# Altium PCB 新苗.PcbDoc
Units mil, origin at the board's own origin, x right, y up, seen from the top; angles counter-clockwise.
Board outline 4469.79 x 3510.17 mil, 2 copper layers (Top Layer, Bottom Layer); 35 components, 129 nets, 275 pads, 129 vias.
Unrouted connection lines stored in the file: 2.
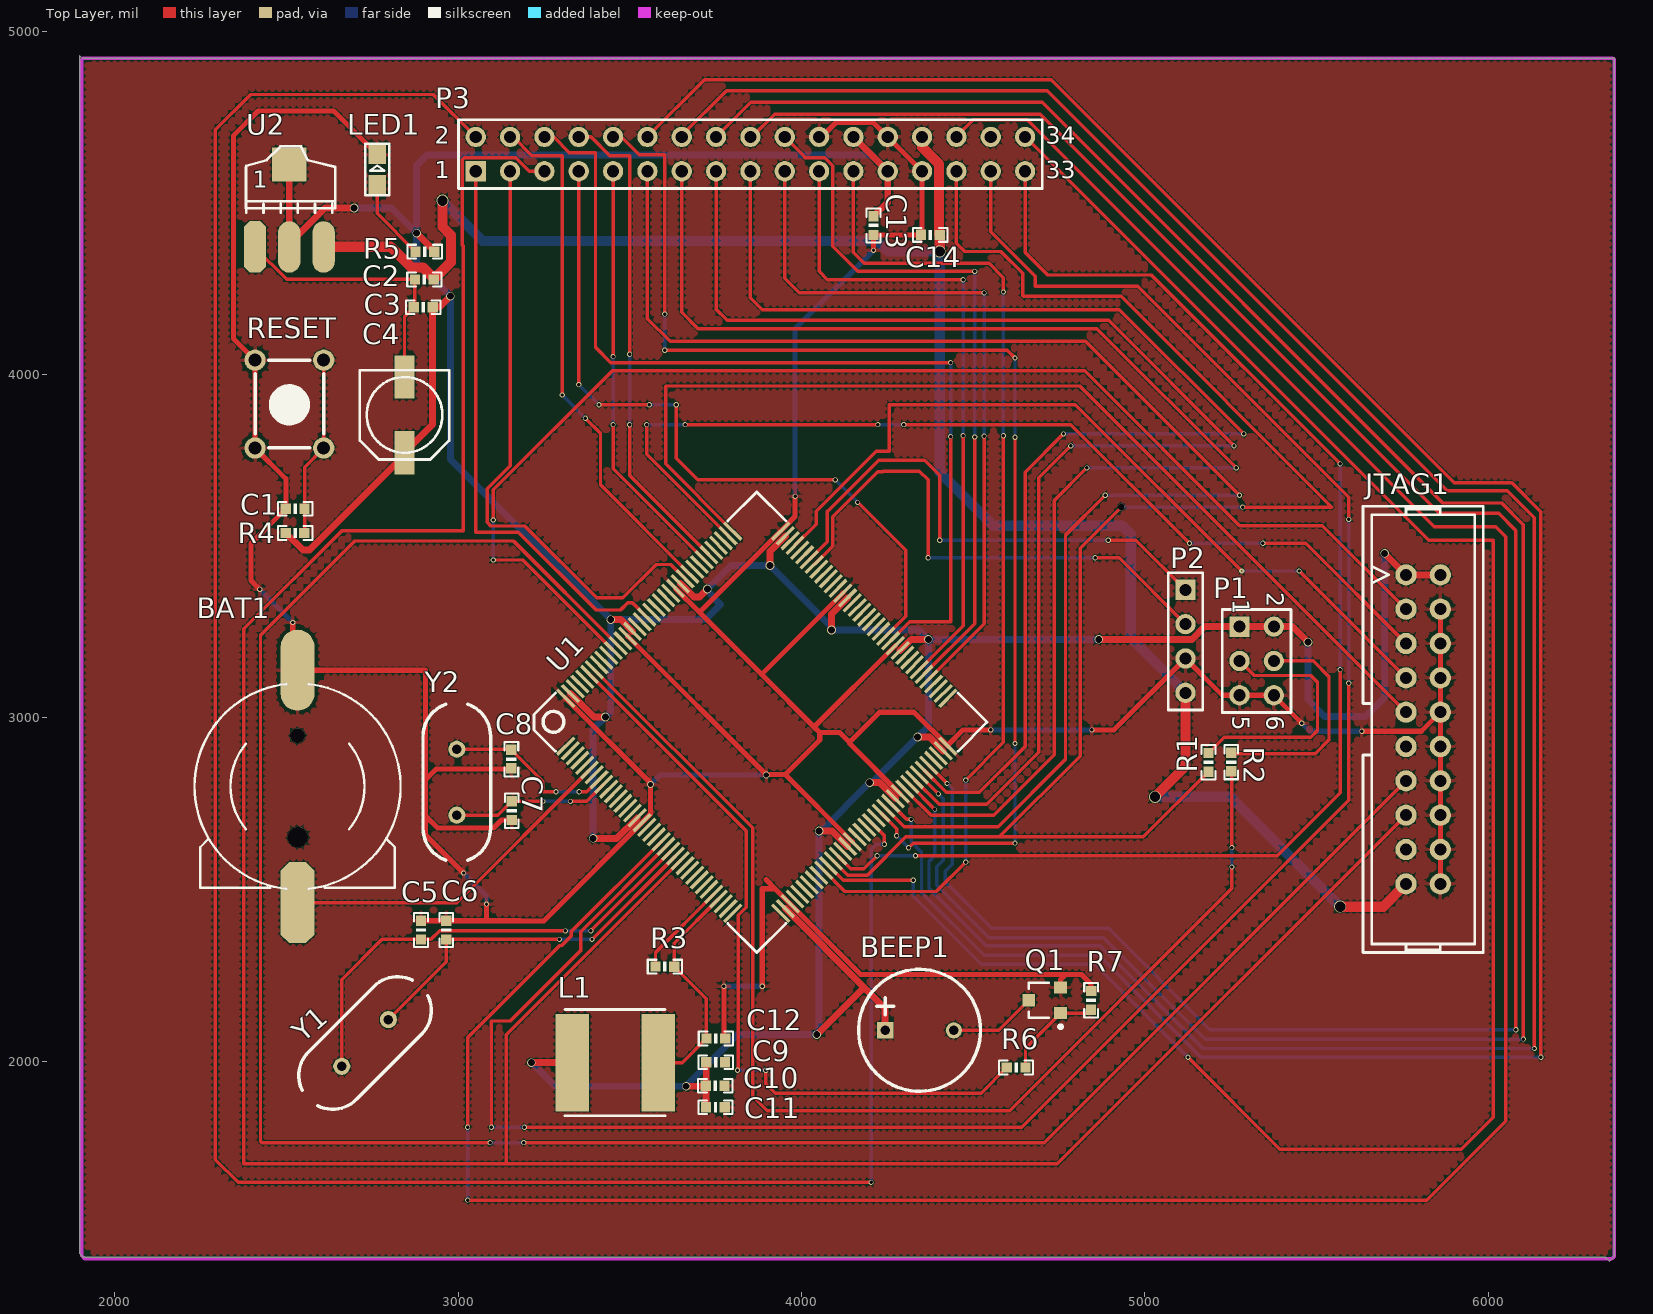
[diagram p0: Top Layer view]
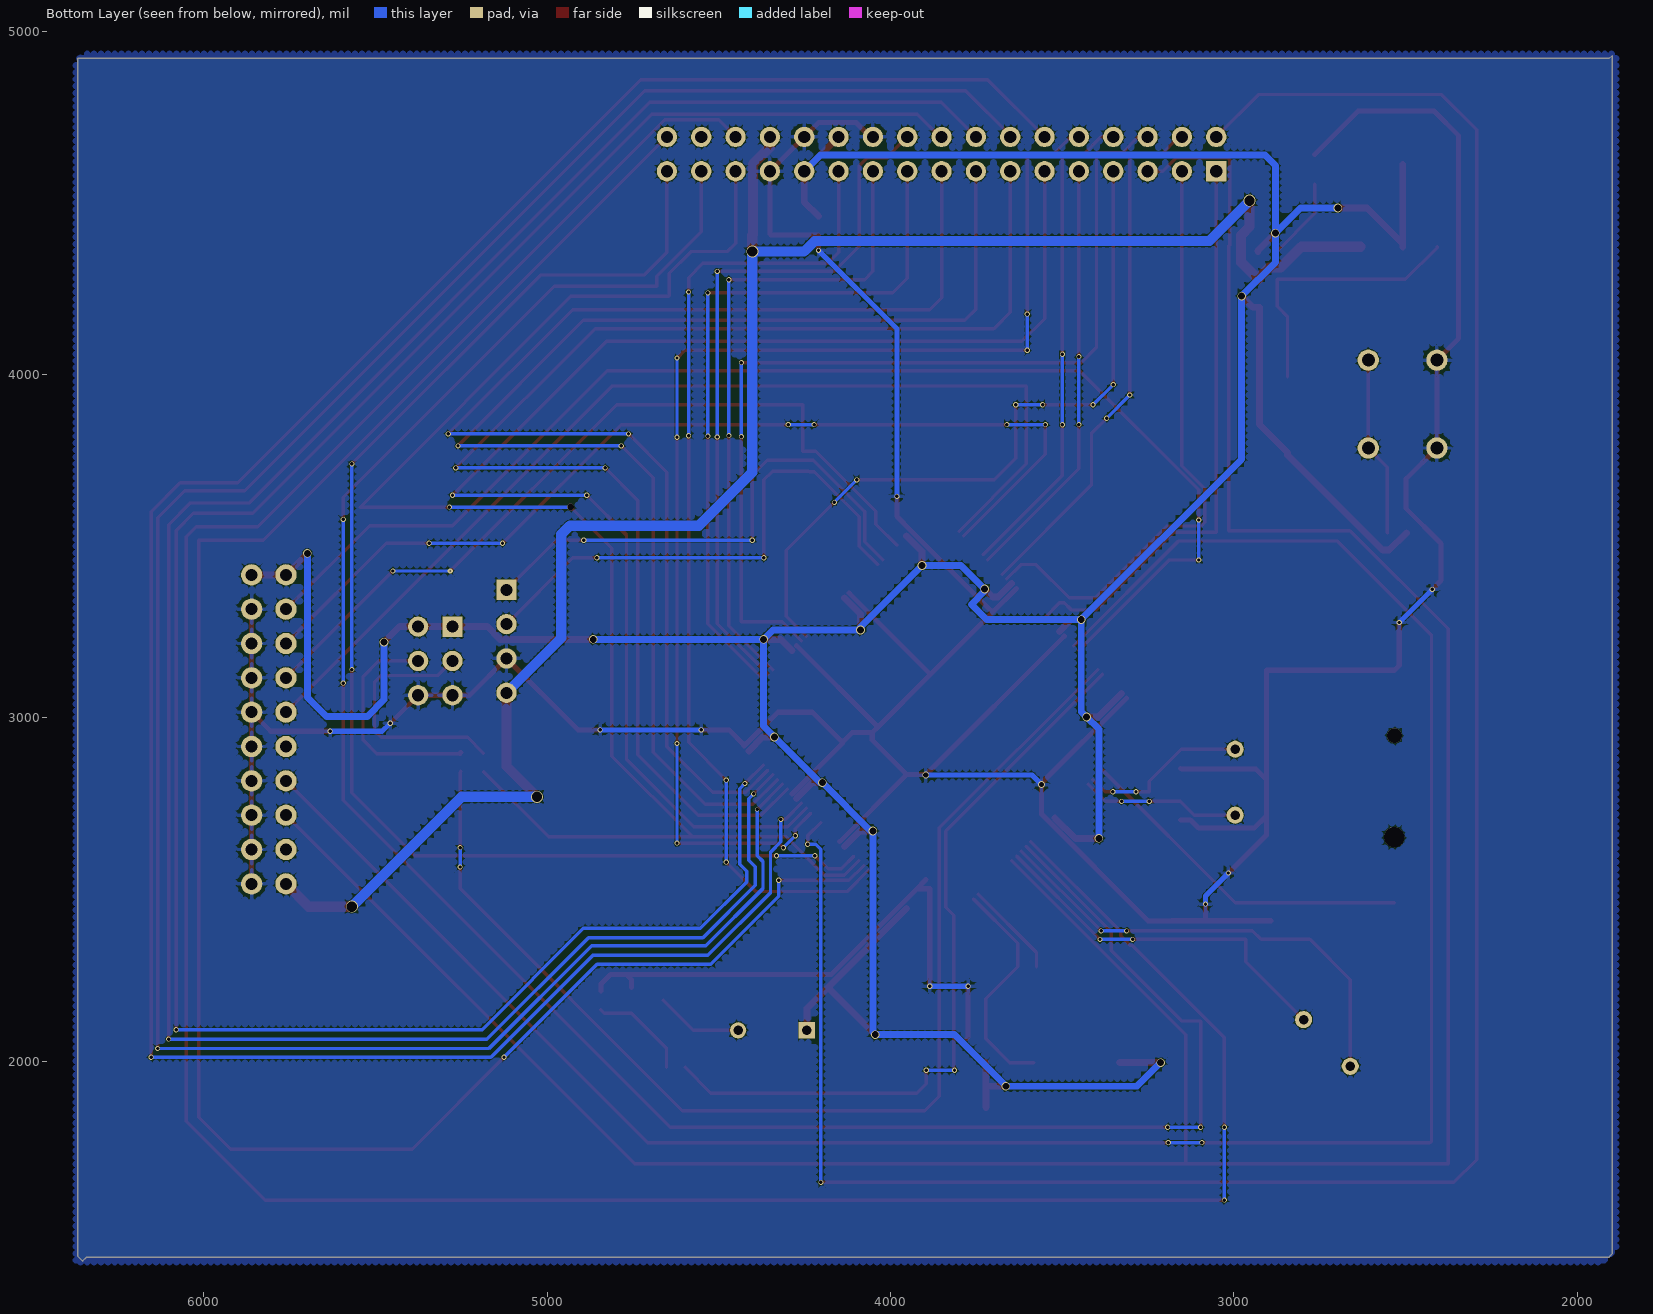
[diagram p1: Bottom Layer view, seen from below]

## Layer stack, top to bottom
Top Layer: signal copper 1.4
Dielectric: dielectric 12.6, FR-4, Dk 4.8
Bottom Layer: signal copper 1.4

## Board outline
1906.64,4921.54 6368.2,4921.54 6368.2,1432.12 6353.66,1417.58 6342.51,1428.73 1908.03,1428.73 1904.14,1432.62 1898.41,1438.36 1898.41,4927.75

## Design rules (kind name [scope] priority, off if disabled: settings)
Clearance [All] p1: gap=2
HoleToHoleClearance [All] p1: gap=1 allowstackedmicrovias=TRUE
MinimumSolderMaskSliver [All] p1: minsoldermaskwidth=1
PolygonConnect [All] p1: connectstyle=Relief reliefconductorwidth=10 reliefentries=4 polygonreliefangle="90 Angle" airgapwidth=10
RoutingVias [All] p1: holewidth=10 width=15 viastyle="Through Hole" minholewidth=10 minwidth=12 maxholewidth=40 maxwidth=30
SilkToSilkClearance [All] p1: silktosilkclearance=1
SilkToSolderMaskClearance [IsPad] p1: minsilkscreentomaskgap=0 clearancetoexposedcopper=TRUE
SolderMaskExpansion [All] p1: expansion=2
Width GND [InNet('GND')] p1: maxlimit=50 minlimit=5 preferedwidth=15
Width 3V3 [InNet('3V3')] p2: maxlimit=20 minlimit=20 preferedwidth=20
Width +5 [InNet('+5')] p3: maxlimit=30 minlimit=30 preferedwidth=30
Width [All] p4: maxlimit=30 minlimit=10 preferedwidth=10
24 further rules are at their usual default settings.

## Components (designator, comment, footprint, x,y, rotation, side; value= is the part's Value field where it differs from the comment)
BAT1 "BATT" BATM 2532.32,2800.09 r0 top
BEEP1 "BEEP" BELL-5 4244.01,2089.71 r0 top
C1 "0.1uF" 0603P 2525.37,3609.15 r0 top
C2 "0.1uF" 0603P 2901.91,4276.74 r180 top
C3 "0.1uF" 0603P 2898.32,4195.9 r0 top
C4 "47uF" CC6.56.5 2844.02,3882.31 r90 top
C5 "22pF" 0603P 2891.99,2381.84 r270 top
C6 "22pF" 0603P 2965.42,2381.84 r270 top
C7 "22pF" 0603P 3156.12,2729.09 r90 top
C8 "22pF" 0603P 3155.16,2879.59 r90 top
C9 "0.1uF" 0603P 3750.4,1996.82 r180 top
C10 "0.1uF" 0603P 3749.3,1928.37 r180 top
C11 "0.1uF" 0603P 3749.78,1865.28 r180 top
C12 "1uF" 0603P 3750.95,2065.81 r180 top
C13 "104" 0603P 4210.05,4434 r270 top
C14 "104" 0603P 4375.32,4406.53 r0 top
JTAG1 "JTAG" JTAG_20 5811.05,2966.3 r270 top
L1 "4.7uH" L_SOP74 3582.83,1995.69 r180 top
LED1 "RED" SMDLED 2764.43,4553.5 r90 top
P1 "Header 3X2" HDR2X3 5276.1,3265.54 r270 top
P2 "Header 4" HDR1X4 5118.78,3372.8 r270 top
P3 "Header 17X2" HDR2X17 3051.53,4591.81 r0 top
Q1 "S8050" SOT-23R 4713.52,2177.1 r90 top
R1 "100K" 0603P 5185.88,2870.3 r270 top
R2 "100K" 0603P 5251.75,2870.97 r90 top
R3 "0" 0603P 3602.49,2275.26 r180 top
R4 "1K" 0603P 2525.37,3538.23 r180 top
R5 "510" 0603P 2902.76,4357.82 r0 top
R6 "1K" 0603P 4625.21,1981.51 r0 top
R7 "10K" 0603P 4843.86,2177.22 r270 top
RESET "KEY_M" KEY_M 2608.65,4041.67 r270 top
U1 "STM32F103ZET6" LQFP144 3313.49,2917.78 r45 top
U2 "AMS1117-3.3" AMS1117 2408.34,4371.51 r0 top
Y1 "8MHz" XTAL_US 2661.2,1984.87 r45 top
Y2 "32.768KHz" XTAL_US 2996.32,2716.3 r90 top

## Footprints (in the part's own frame and the unit in brackets; to place one, negate y for a bottom-side part, rotate by r counter-clockwise, add the part's x,y. Pads: shape width x height; smd on the part's side, far side on the other; paste and mask are expansions set on the pad)
0603P [mil]
  rect 30x30 smd: 1(-27,0) 2(27.5,-0.06)
  silkscreen extent -50,-20 50,20
AMS1117 [mil]
  oct 65x150 smd: 1(0.03,-0.06)
  oval 65x150 smd: 2(100.03,-0.06) 3(200.03,-0.06)
  rect 100x100 smd: 4(100.03,239.94)
  silkscreen extent -26,100 234,293
BATM [mm]
  round 1.1 hole 1.1 unplated: 0(0,3.748)
  round 1.5 hole 1.5 unplated: 0(0.025,-3.752)
  oct 2.5x6 smd: 1(0,-8.602)
  oval 2.5x6 smd: 2(0,8.598)
  silkscreen extent -7.62,-7.58 7.62,7.57
BELL-5 [mm]
  rect 1.2x1.2 hole 0.7: 1(0,0)
  round 1.2 hole 0.7: 2(5.08,0)
  silkscreen extent -1.97,-4.51 7.05,4.51
CC6.56.5 [mm]
  rect 3.2x1.5 smd: 1(-2.794,0) 2(2.8,0)
  silkscreen extent -3.3,-3.3 3.3,3.3
HDR1X4 [mm]
  rect 1.5x1.5 hole 0.889: 1(0,0)
  round 1.5 hole 0.889: 2(2.54,0) 3(5.08,0) 4(7.62,0)
  silkscreen extent -1.27,-1.27 8.89,1.27
HDR2X3 [mm] "Connector; Header; 3x2 Position"
  rect 1.5x1.5 hole 0.9: 1(0,0)
  round 1.5 hole 0.9: 2(0,2.54) 3(2.54,0) 4(2.54,2.54) 5(5.08,0) 6(5.08,2.54)
  silkscreen extent -1.27,-1.27 6.35,3.81
HDR2X17 [mm] "Connector; Header; 17x2 Position"
  rect 1.5x1.5 hole 0.9: 1(0,0)
  round 1.5 hole 0.9: 2(0,2.54) 3(2.54,0) 4(2.54,2.54) 5(5.08,0) 6(5.08,2.54) 7(7.62,0) 8(7.62,2.54) 9(10.16,0) 10(10.16,2.54) 11(12.7,0) 12(12.7,2.54) 13(15.24,0) 14(15.24,2.54) 15(17.78,0) 16(17.78,2.54) 17(20.32,0) 18(20.32,2.54) 19(22.86,0) 20(22.86,2.54) 21(25.4,0) 22(25.4,2.54) 23(27.94,0) 24(27.94,2.54) 25(30.48,0) 26(30.48,2.54) 27(33.02,0) 28(33.02,2.54) 29(35.56,0) 30(35.56,2.54) 31(38.1,0) 32(38.1,2.54) 33(40.64,0) 34(40.64,2.54)
  silkscreen extent -1.27,-1.27 41.91,3.81
JTAG_20 [mil]
  round 62 hole 35: 1(-450,-50) 2(-450,50) 3(-350,-50) 4(-350,50) 5(-250,-50) 6(-250,50) 7(-150,-50) 8(-150,50) 9(-50,-50) 10(-50,50) 11(50,-50) 12(50,50) 13(150,-50) 14(150,50) 15(250,-50) 16(250,50) 17(350,-50) 18(350,50) 19(450,-50) 20(450,50)
  silkscreen extent -650,-175 650,175
KEY_M [mil]
  round 62 hole 38: 1(0,0) 1(255.91,0) 2(0,-200) 2(255.91,-200)
  silkscreen extent 0,-200 255,0
L_SOP74 [mm]
  rect 2.5x7.2 smd: 1(0,0) 2(6.35,0)
  silkscreen extent -0.51,-3.94 6.89,3.94
LQFP144 [mil]
  rect 70.87x10 smd: 1(-0.35,0.02) 2(-0.35,-19.66) 3(-0.35,-39.35) 4(-0.35,-59.03) 5(-0.35,-78.72) 6(-0.35,-98.4) 7(-0.35,-118.09) 8(-0.35,-137.77) 9(-0.35,-157.46) 10(-0.35,-177.14) 11(-0.35,-196.83) 12(-0.35,-216.51) 13(-0.35,-236.2) 14(-0.35,-255.88) 15(-0.35,-275.57) 16(-0.35,-295.25) 17(-0.35,-314.94) 18(-0.35,-334.62) 19(-0.35,-354.31) 20(-0.35,-373.99) 21(-0.35,-393.68) 22(-0.35,-413.36) 23(-0.35,-433.05) 24(-0.35,-452.73) 25(-0.35,-472.42) 26(-0.35,-492.1) 27(-0.35,-511.79) 28(-0.35,-531.47) 29(-0.35,-551.16) 30(-0.35,-570.84) 31(-0.35,-590.53) 32(-0.35,-610.21) 33(-0.35,-629.9) 34(-0.35,-649.58) 35(-0.35,-669.27) 36(-0.35,-688.95) 73(885.47,-688.95) 74(885.47,-669.27) 75(885.47,-649.58) 76(885.47,-629.9) 77(885.47,-610.21) 78(885.47,-590.53) 79(885.47,-570.84) 80(885.47,-551.16) 81(885.47,-531.47) 82(885.47,-511.79) 83(885.47,-492.1) 84(885.47,-472.42) 85(885.47,-452.73) 86(885.47,-433.05) 87(885.47,-413.36) 88(885.47,-393.68) 89(885.47,-373.99) 90(885.47,-354.31) 91(885.47,-334.62) 92(885.47,-314.94) 93(885.47,-295.25) 94(885.47,-275.57) 95(885.47,-255.88) 96(885.47,-236.2) 97(885.47,-216.51) 98(885.47,-196.83) 99(885.47,-177.14) 100(885.47,-157.46) 101(885.47,-137.77) 102(885.47,-118.09) 103(885.47,-98.4) 104(885.47,-78.72) 105(885.47,-59.03) 106(885.47,-39.35) 107(885.47,-19.66) 108(885.47,0.02)
  rect 10x70.87 smd: 37(98.07,-787.38) 38(117.76,-787.38) 39(137.44,-787.38) 40(157.13,-787.38) 41(176.81,-787.38) 42(196.5,-787.38) 43(216.18,-787.38) 44(235.87,-787.38) 45(255.55,-787.38) 46(275.24,-787.38) 47(294.92,-787.38) 48(314.61,-787.38) 49(334.29,-787.38) 50(353.98,-787.38) 51(373.66,-787.38) 52(393.35,-787.38) 53(413.03,-787.38) 54(432.72,-787.38) 55(452.4,-787.38) 56(472.09,-787.38) 57(491.77,-787.38) 58(511.46,-787.38) 59(531.14,-787.38) 60(550.83,-787.38) 61(570.51,-787.38) 62(590.2,-787.38) 63(609.88,-787.38) 64(629.57,-787.38) 65(649.25,-787.38) 66(668.94,-787.38) 67(688.62,-787.38) 68(708.31,-787.38) 69(727.99,-787.38) 70(747.68,-787.38) 71(767.36,-787.38) 72(787.05,-787.38) 109(787.05,98.45) 110(767.36,98.45) 111(747.68,98.45) 112(727.99,98.45) 113(708.31,98.45) 114(688.62,98.45) 115(668.94,98.45) 116(649.25,98.45) 117(629.57,98.45) 118(609.88,98.45) 119(590.2,98.45) 120(570.51,98.45) 121(550.83,98.45) 122(531.14,98.45) 123(511.46,98.45) 124(491.77,98.45) 125(472.09,98.45) 126(452.4,98.45) 127(432.72,98.45) 128(413.03,98.45) 129(393.35,98.45) 130(373.66,98.45) 131(353.98,98.45) 132(334.29,98.45) 133(314.61,98.45) 134(294.92,98.45) 135(275.24,98.45) 136(255.55,98.45) 137(235.87,98.45) 138(216.18,98.45) 139(196.5,98.45) 140(176.81,98.45) 141(157.13,98.45) 142(137.44,98.45) 143(117.76,98.45) 144(98.07,98.45)
  silkscreen extent -32,-819 917,130
SMDLED [mm]
  rect 1.4x1.27 smd: 1(0.001,-0.002) 2(2.211,-0.002)
  silkscreen extent -0.8,-0.89 3.01,0.89
SOT-23R [mm]
  rect 0.9x0.95 smd: 1(0.95,-1.048) 2(-0.95,-1.048) 3(0,1.302)
  silkscreen extent -2.07,-1.17 1.3,1.3
XTAL_US [mil]
  round 50 hole 28: 1(0,0) 2(192.13,0)
  silkscreen extent -131,-98 323,98

## Part data
BAT1: library part BAT
C1 C2 C3 C5 C6 C7 C8 C9 C10 C11 C12 C13 C14: library part C
C4: library part CAP
L1: library part L_SOP
LED1: library part LED2, "Typical RED, GREEN, YELLOW, AMBER GaAs LED"
P1: "Header, 3-Pin, Dual row"
P2: "Header, 4-Pin"
P3: "Header, 17-Pin, Dual row"
Q1: library part NPN, "8050/BCW846/BCW847"
R1 R2 R3 R4 R5 R6 R7: library part R
U2: library part AMS1117
Y1 Y2: library part XTAL, "Crystal Oscillator"

## Via types
v1: diameter 15, hole 10, Top Layer to Bottom Layer, 101 vias
v2: diameter 25, hole 20, Top Layer to Bottom Layer, 19 vias
v3: diameter 35, hole 30, Top Layer to Bottom Layer, 4 vias
v4: diameter 20, hole 15, Top Layer to Bottom Layer, 2 vias
v5: diameter 15, hole 0, Top Layer to Bottom Layer, 1 vias
v6: diameter 20, hole 20, Top Layer to Bottom Layer, 1 vias
v7: diameter 12, hole 10, Top Layer to Bottom Layer, 1 vias

## Nets (pads, with @x,y where several pads share a name; then routed paths per layer and width w, separated by ;. In a path a pad name is that pad's centre, name@x,y a point inside that pad or via, vN(x,y) a via of type N, cw(c..) or ccw(c..) an arc to the next point about the centre after c; other vN are vias at no path point)
3V3: BEEP1.1 C3.2 C4.1 C9.2 C10.2 C11.2 C13.1 JTAG1.1 JTAG1.2 L1.2 P1.1 P1.2 P3.24 P3.25 R4.2 R5.2 U1.16 U1.38 U1.51 U1.61 U1.71 U1.83 U1.94 U1.107 U1.120 U1.130 U1.143 U2.2 U2.4 | length 13286.4
  Top Layer w20: R4.2 2547.62,3488.53 2567.65,3488.53 2844.02,3764.9 C4.1 2925.82,3854.11 C3.2 2945.31,4195.83 v2(2977.78,4228.3) ; U2.2 U2.2@2508.38,4381.12 ; U2.4 U2.2@2508.38,4381.12 ; v2(2697.3,4484.89) 2612.15,4484.89 U2.2@2508.38,4381.12 ; v2(2879.32,4411.83) 2930.26,4360.89 R5.2 ; v2(3213.48,1995.69) L1.2 ; U1.143 3395.42,3002.38 v2(3428.93,3002.38) ; v2(3393.26,2648.53) 3461.78,2648.53 U1.16 ; v2(3444.84,3285.88) 3473.83,3285.88 U1.130 ; U1.120 3686.73,3351.37 ; v2(3664.1,1926.97) 3720.34,1926.97 C10.2 ; 3689.31,3351.37 3702.97,3351.37 v2@3726.38,3374.79 ; C11.2 3721.8,1865.82 C10.2 ; C9.2 3722.9,1929.53 C10.2 ; v2(3908.48,3443.46) 3908.48,3484.97 U1.107 ; U1.38 4182.7,2215.11 ; v2(4044.81,2077.21) 4182.7,2215.11 ; v2(4051.53,2670.17) 4089.54,2670.17 U1.51 ; v2(4087.63,3255.78) 4087.63,3302.22 U1.94 ; P3.24 P3.25 4251.53,4502.48 C13.1 ; v2(4198.75,2811.08) 4227.02,2811.08 U1.61 ; BEEP1.1 4244.01,2153.79 4182.7,2215.11 ; U1.83 4319.91,3228.27 v2(4370.04,3228.27) ; v2(4338.47,2944) 4372.48,2944 U1.71 ; v2(4865.89,3228.27) 5137.23,3228.27 5174.49,3265.54 P1.1 P1.2 5430.3,3265.54 v2(5475.47,3220.36) ; v2(5698.7,3478.65) JTAG1.1 JTAG1.2
  Bottom Layer w20: v2(2697.3,4484.89) 2806.25,4484.89 v2(2879.32,4411.83) ; v2(3213.48,1995.69) 3282.19,1926.97 v2(3664.1,1926.97) 3814.35,2077.21 v2(4044.81,2077.21) 4051.53,2083.94 v2(4051.53,2670.17) 4057.84,2670.17 v2(4198.75,2811.08) 4205.54,2811.08 v2(4338.47,2944) 4370.04,2975.57 v2(4370.04,3228.27) ; v2(3393.26,2648.53) 3393.26,2966.72 v2(3428.93,3002.38) 3444.84,3018.3 v2(3444.84,3285.88) ; P3.25 4204.23,4639.12 2909.98,4639.12 2879.32,4608.46 v2(2879.32,4411.83) ; v2(4865.89,3228.27) v2(4370.04,3228.27) ; v2(5475.47,3220.36) 5475.47,3052.6 5524.1,3003.97 5643.23,3003.97 5698.7,3059.44 v2(5698.7,3478.65) ; v2(2879.32,4411.83) 2879.32,4326.76 v2(2977.78,4228.3) 2977.78,3752.95 v2(3444.84,3285.88) ; v2(3444.84,3285.88) 3720.32,3285.88 3764.7,3330.27 3726.12,3368.86 v2(3726.12,3375.11) 3794.47,3443.46 v2(3908.48,3443.46) 4087.63,3264.3 v2(4087.63,3255.78) 4342.53,3255.78 v2(4370.04,3228.27)
+5: C2.1 C14.2 JTAG1.19 P2.4 P3.28 U2.3 | length 5495.9
  Top Layer w30: U2.3@2631.94,4371.92 2803.38,4371.92 2863.49,4311.81 2897.69,4311.81 2928.91,4280.59 C2.1 2979.14,4326.98 2979.14,4406.07 2954.68,4430.54 v3(2954.68,4506.07) ; P3.28 4351.53,4661.86 4401.06,4612.33 4401.06,4408.22 C14.2 v3(4402.82,4358.15) ; v3(5029.97,2769.91) 5118.78,2858.72 P2.4 ; v3(5569.15,2450.01) 5694.76,2450.01 JTAG1.19
  Bottom Layer w30: v3(2954.68,4506.07) 3071.94,4388.81 4221.38,4388.81 4252.04,4358.15 v3(4402.82,4358.15) 4402.82,3715.1 4558.42,3559.49 4933.97,3559.49 4959.26,3534.2 4959.26,3232.32 P2.4 ; v3(5029.97,2769.91) 5249.24,2769.91 v3(5569.15,2450.01)
BEEP: R6.1 U1.139 | length 2214.5
  Top Layer w10: U1.139 3838.99,2670.17 3838.99,2447.75 3816.15,2424.9 v1@3816.15,1973.38 ; v1(3896.16,1973.38) 3896.16,1934.63 3923.83,1906.95 4523.65,1906.95 R6.1
  Bottom Layer w10: v1@3816.15,1973.38 v1(3896.16,1973.38)
  other v1: 3813.96,1973.38
BL: P3.23 U1.46 | length 2926.2
  Top Layer w10: U1.46 4126.51,2494.01 4393.1,2494.01 v1(4478.57,2579.48) ; P3.23 4151.53,4355.79 4183.38,4323.94 4546.55,4323.94 4588.42,4282.08 v1(4588.42,4240.13) ; v1(4478.57,2818.35) 4588.42,2928.19 v1(4588.42,3821.51)
  Bottom Layer w10: v1(4478.57,2579.48) v1(4478.57,2818.35) ; v1(4588.42,3821.51) v1(4588.42,4240.13)
BOOT0: R2.1 U1.138 | length 3457.6
  Top Layer w10: U1.138 3857.79,2679.21 3857.79,1897.78 3900.4,1855.17 4606.3,1855.17 5253.98,2502.84 v1(5253.98,2565.34) ; R2.1 5253.98,2841.74 v1(5253.98,2622.01)
  Bottom Layer w10: v1(5253.98,2565.34) v1(5253.98,2622.01)
BOOT1: P3.29 R1.2 U1.48 | length 4615.8
  Top Layer w10: U1.48 4134.47,2541.73 4192.52,2541.73 4303.88,2653.08 4576.89,2653.08 ; P3.29 4451.53,4382.62 4476.01,4358.15 4581.11,4358.15 4644.54,4294.72 4644.54,4229.48 4646.35,4227.66 4931.04,4227.66 5545.22,3613.48 v1(5285.03,3613.48) ; v6(4931.54,3613.48) 4811.62,3493.56 4811.62,2887.81 4576.89,2653.08 ; R1.2 4996.1,2653.08 4576.89,2653.08
  Bottom Layer w10: v6(4931.54,3613.48) v1(5285.03,3613.48)
CLK: P3.34 U1.47 | length 5874.9
  Top Layer w10: U1.47 4121.63,2526.73 v1(4325.76,2526.73) ; P3.34 5826.77,3516.58 6015.1,3516.58 6015.1,1836.21 5922.28,1743.38 5393.89,1743.38 v1(5126.05,2011.22)
  Bottom Layer w10: v1(4325.76,2526.73) 4325.76,2480.26 4523.87,2282.15 4855.12,2282.15 v1(5126.05,2011.22)
CS: P3.33 U1.49 | length 3937.4
  Top Layer w10: U1.49 4144.16,2559.87 4182.1,2559.87 v1(4220.51,2598.28) ; v1(4332.27,2598.28) 5385.97,2598.28 5569.26,2781.57 v1(5569.26,3140.39) ; P3.33 4651.53,4355.28 4717.13,4289.68 5019.07,4289.68 v1(5569.26,3739.5)
  Bottom Layer w10: v1(4220.51,2598.28) v1(4332.27,2598.28) ; v1@5569.16,3140.3 v1(5569.26,3140.39) v1(5569.26,3739.5)
D0: P3.6 U1.85 | length 2740.5
  Top Layer w10: P3.6 3278.18,4691.81 3323.73,4646.26 3400.19,4646.26 3400.19,4078.67 3444.29,4034.57 v1(4434.46,4034.57) ; U1.85 4315.42,3279.45 4434.46,3279.45 v1(4434.46,3818.86)
  Bottom Layer w10: v1(4434.46,3818.86) v1(4434.46,4034.57)
D1: P3.7 U1.86 | length 2138.8
  Top Layer w10: v1(3351.53,3970.59) P3.7 ; v1(3410.48,3911.65) v1(3557.07,3911.65) ; v1(3635.33,3911.65) 3635.33,3755.88 3698.21,3693 v1(4098.4,3693) ; v1(4163.89,3627.51) 4303.88,3487.52 4303.88,3295.75 U1.86
  Bottom Layer w10: v1(3351.53,3970.59) v1(3410.48,3911.65) ; v1(3557.07,3911.65) v1(3635.33,3911.65) ; v1(4098.4,3693) v1(4163.89,3627.51)
D2: P3.8 U1.114 | length 1429.2
  Top Layer w10: P3.8 3387.12,4691.81 3441.8,4637.14 3499.49,4637.14 v1(3499.49,4058.68) ; v1(3499.49,3853.53) 3499.49,3705.64 U1.114
  Bottom Layer w10: v1(3499.49,3853.53) v1(3499.49,4058.68)
D3: P3.9 U1.115 | length 1241.3
  Top Layer w10: v1(3451.53,3853.87) 3451.53,3725.76 U1.115 ; v1(3451.53,4052.07) P3.9
  Bottom Layer w10: v1(3451.53,3853.87) v1(3451.53,4052.07)
D4: P3.10 U1.58 | length 3633.6
  Top Layer w10: P3.10 3475.17,4691.81 3527.16,4639.82 3602.13,4639.82 v1(3602.13,4175.69) ; v1(3602.13,4070.42) 4599.55,4070.42 v1(4622.07,4047.9) ; U1.58 4277.38,2677.2 v1(4277.38,2656.38) ; v1(4312.24,2621.53) 4325.56,2634.85 v1(4622.07,2634.85) ; v1(4622.07,2925.18) v1(4622.07,3817.33)
  Bottom Layer w10: v1(3602.13,4070.42) v1(3602.13,4175.69) ; v1(4277.38,2656.38) v1(4312.24,2621.53) ; v1(4622.07,2634.85) v1(4622.07,2925.18) ; v1(4622.07,3817.33) v1(4622.07,4047.9)
D5: P3.11 U1.59 | length 4202.1
  Top Layer w10: P3.11 3551.53,4162.88 3617.63,4096.79 4827.43,4096.79 v1(5276.1,3648.13) ; U1.59 4299.81,2682.61 4572.81,2682.61 4769.16,2878.97 4769.16,3532.45 v1(4884.84,3648.13)
  Bottom Layer w10: v1(4884.84,3648.13) v1(5276.1,3648.13)
D6: P3.12 U1.60 | length 7088.7
  Top Layer w10: P3.12 3717.71,4857.98 4727.78,4857.98 5901.58,3684.18 6069.84,3684.18 6153.77,3600.26 v1(6153.77,2011.23) ; U1.60 4306.06,2704.2 v1(4319.42,2704.2)
  Bottom Layer w10: v1(4319.42,2704.2) 4319.42,2639.09 4349.77,2608.74 4349.77,2490.53 4532,2308.3 4866.92,2308.3 5163.99,2011.23 v1(6153.77,2011.23)
D7: P3.13 U1.63 | length 4062.7
  Top Layer w10: P3.13 3651.53,4180.92 3698.79,4133.66 4860.5,4133.66 v1(5266.46,3727.7) ; U1.63 4377.48,2716.3 4560.73,2716.3 4736.79,2892.35 4736.79,3632.94 v1(4831.55,3727.7)
  Bottom Layer w10: v1(4831.55,3727.7) v1(5266.46,3727.7)
D8: P3.14 U1.64 | length 6900.2
  Top Layer w10: P3.14 3651.53,4696.66 3781.78,4826.91 4716.59,4826.91 5881.68,3661.82 6055.51,3661.82 6134.81,3582.52 v1(6134.81,2036.76) ; U1.64 v7(4388.64,2732.97)
  Bottom Layer w10: v7(4388.64,2732.97) 4388.64,2598.25 4371.75,2581.36 4371.75,2502.71 4538.99,2335.47 4871,2335.47 5169.71,2036.76 v1(6134.81,2036.76)
D9: P3.15 U1.65 | length 3937.5
  Top Layer w10: P3.15 3751.53,4190.73 3751.31,4190.51 3784.49,4157.34 4894.78,4157.34 v1(5260.08,3792) ; U1.65 4401.16,2748.29 4539.64,2748.29 4690.97,2899.63 4690.97,3698.62 v1(4784.36,3792) ; v1(5260.08,3792) v1@5261.06,3791.06
  Bottom Layer w10: v1@4784.32,3791.96 v1(4784.36,3792) v1(5260.08,3792)
D10: P3.16 U1.66 | length 6654.2
  Top Layer w10: P3.16 3852.33,4792.61 4701.29,4792.61 5868.32,3625.58 6039.85,3625.58 6102.87,3562.57 v1(6102.87,2063.94) ; U1.66 v1(4398.94,2778.36)
  Bottom Layer w10: v1(4398.94,2778.36) 4412.55,2764.74 4412.55,2584.84 4393.64,2565.92 4393.64,2512.66 4546.45,2359.85 4879.94,2359.85 5175.86,2063.94 v1(6102.87,2063.94)
D11: P3.17 U1.67 | length 3828.2
  Top Layer w10: P3.17 3851.53,4222.85 3885.77,4188.62 4926.31,4188.62 v1@5288.21,3826.72 ; U1.67 4422.5,2782.63 4517.87,2782.63 4651.53,2916.3 4651.53,3714.9 v1(4763.33,3826.7)
  Bottom Layer w10: v1(4763.33,3826.7) v1(5288.32,3826.7)
D12: P3.18 U1.68 | length 6430.3
  Top Layer w10: P3.18 3856.05,4691.81 3921.96,4757.73 4695.72,4757.73 5857.95,3595.49 6030.97,3595.49 6080.9,3545.56 v1(6080.9,2091.44) ; U1.68 v1(4424.31,2808.66)
  Bottom Layer w10: v1(4424.31,2808.66) 4439.07,2793.9 4439.07,2573.56 4418.5,2552.99 4418.5,2521.72 4553.84,2386.39 4895.27,2386.39 5189.83,2091.83 5190.22,2091.44 v1(6080.9,2091.44)
D13: P3.19 U1.77 | length 2101.7
  Top Layer w10: P3.19 3951.53,4280.05 3994.2,4237.38 v1(4532.14,4237.38) ; U1.77 4532.14,3273.46 v1(4532.14,3820.5)
  Bottom Layer w10: v1(4532.14,3820.5) v1(4532.14,4237.38)
D14: P3.20 U1.78 | length 2087.7
  Top Layer w10: P3.20 4009.19,4634.15 4009.19,4631.34 4067.91,4631.34 4091.06,4608.19 4091.06,4372.91 4163.89,4300.08 v1(4504.93,4300.08) ; U1.78 4504.93,3274.1 v1(4504.93,3817.94)
  Bottom Layer w10: v1(4504.93,3817.94) v1@4504.93,4297.71
D15: P3.21 U1.79 | length 1910
  Top Layer w10: P3.21 4051.53,4300.08 4075.76,4275.86 v1(4471.16,4275.86) ; U1.79 4471.16,3268.16 v1(4471.16,3822)
  Bottom Layer w10: v1(4471.16,3822) v1(4471.16,4275.86)
GND: BAT1.2 C1.1 C5.1 C6.1 C7.1 C8.1 C9.1 C10.1 C11.1 C12.1 C13.2 C14.1 JTAG1.4 JTAG1.6 JTAG1.8 JTAG1.10 JTAG1.12 JTAG1.14 JTAG1.16 JTAG1.18 JTAG1.20 LED1.2 P1.5 P1.6 P2.3 P3.22 P3.26 P3.27 Q1.1 R7.1 RESET.2 U1.17 U1.39 U1.52 U1.62 U1.72 U1.84 U1.95 U1.108 U1.121 U1.131 U1.144 | length 14709.1
  Top Layer w15: v1(2422.27,3373.77) 2396.54,3399.5 2396.54,3507.32 C1.1 2498.37,3696.06 2408.65,3785.77 2408.65,4041.67 2345.42,4104.91 2345.42,4695 2417.5,4767.08 2637.96,4767.08 LED1.2 ; v1(2518.54,3277.5) 2518.54,3152.39 BAT1.2 2905.42,3138.61 2905.42,2819.5 ; C5.1 C6.1 3082.33,2408.84 3082.81,2409.32 ; v1(3016.09,2547.84) 2905.42,2658.51 2905.42,2714.1 ; v1(3082.81,2457.45) 3082.81,2409.32 ; C8.1 3153.01,2850.43 2936.36,2850.43 2905.42,2819.5 ; C7.1 3126.43,2702.09 3103.13,2678.8 2940.73,2678.8 2905.42,2714.1 ; U1.144 v4@3563.11,2806.86 ; U1.131 v4@3897.03,2834.84 ; v4(3560.54,2805.52) 3560.54,2719.45 3249.39,2408.3 3181.92,2408.3 3181.38,2408.84 3083.29,2408.84 3082.81,2409.32 ; U1.121 3702.97,3307.29 ; v1(3774.38,2218.09) 3774.38,2069.38 C12.1 ; v1(3886,2218.09) 3886,2502.24 3923.4,2502.24 ; 3897.03,2528.61 3923.4,2502.24 ; v4@3897.03,2833.14 v4@3897.03,2834.84 ; v1(3981.63,3644.69) 3981.63,3585.95 U1.108 3702.97,3307.29 ; P3.22 4058.62,4691.81 4100.64,4733.84 4209.51,4733.84 P3.26 P3.27 4351.53,4409.75 C14.1 ; U1.95 3886,3128.43 3886,3124.26 ; U1.52 3952.71,2834.84 ; v1(4209.99,4361.31) C13.2 4210.56,4405.93 C14.1@4344.74,4405.93 ; U1.84 4037.03,2973.23 ; U1.62 4140.02,2925.92 4140.02,2928.75 ; U1.72 U1.72@4425.23,2919.1 ; v1(4551.51,2964.93) 4471.06,2964.93 U1.72@4425.23,2919.1 ; Q1.1 4754.78,2237.17 4770.2,2252.6 ; R7.1 4843.86,2224.2 4815.47,2252.6 4770.2,2252.6 ; v1(4846.1,2964.93) 4910.91,2964.93 P2.3 5226.04,3065.54 P1.5 P1.6 v1(5457.5,2984.13) ; v1(5632.4,2960.6) 5805.36,2960.6 JTAG1.10 ; JTAG1.20 JTAG1.18 JTAG1.16 JTAG1.14 JTAG1.12 JTAG1.10 ; JTAG1.4 JTAG1.6 JTAG1.8 JTAG1.10 ; 2905.42,2714.1 2905.42,2819.5 ; 3702.97,3307.29 3886,3124.26 ; 3886,3124.26 4037.03,2973.23 ; v4@3897.03,2834.84 3952.71,2834.84 ; 3923.4,2502.24 4173.05,2252.6 4770.2,2252.6 ; 3952.71,2834.84 4053.23,2935.36 4053.23,2957.03 ; 4037.03,2973.23 4053.23,2957.03 ; 4053.23,2957.03 4111.74,2957.03 4140.02,2928.75 ; 4140.02,2928.75 4227.56,3016.3 4328.03,3016.3 U1.72@4425.23,2919.1
  Bottom Layer w15: v1(2422.27,3373.77) v1(2518.54,3277.5) ; v1(3016.09,2547.84) 3082.81,2481.13 v1(3082.81,2457.45) ; v4(3560.54,2805.52) 3588.16,2833.14 v4(3897.77,2833.14) ; v1(3774.38,2218.09) v1(3886,2218.09) ; v1(3981.63,3644.69) 3981.63,4132.94 v1(4209.99,4361.31) ; v1(4551.51,2964.93) v1(4846.1,2964.93) ; v1(5457.5,2984.13) 5481.03,2960.6 v1(5632.4,2960.6)
JNRST: JTAG1.3 U1.134 | length 3753.3
  Top Layer w10: v1(3102.59,3459.64) 3188.71,3459.64 U1.134 ; v1(3102.59,3576.18) 3102.59,3663.79 3449.81,4011.02 4824.72,4011.02 5276.03,3559.71 5517.64,3559.71 JTAG1.3
  Bottom Layer w10: v1(3102.59,3459.64) v1(3102.59,3576.18)
JTCK: JTAG1.9 U1.109 | length 3053.5
  Top Layer w10: U1.109 3604.63,3739.69 3604.63,3966.4 4810.95,3966.4 JTAG1.9
JTDI: JTAG1.5 U1.110 | length 2898.2
  Top Layer w10: v1(3549.12,3853.87) 3549.12,3767.37 U1.110 ; v1(3661.3,3853.87) v1(4222.97,3853.87) ; v1(4298.33,3853.87) 4784.84,3853.87 v1(5130.5,3508.22) ; v1(5344.05,3508.22) 5469.13,3508.22 JTAG1.5
  Bottom Layer w10: v1(3549.12,3853.87) v1(3661.3,3853.87) ; v1(4222.97,3853.87) v1(4298.33,3853.87) ; v1(5130.5,3508.22) v1(5344.05,3508.22)
JTDO: JTAG1.13 U1.133 | length 6530.2
  Top Layer w10: v1(3093.38,1762.61) 2428.9,1762.61 2424.56,1766.95 2424.56,3240.78 2698.64,3514.86 3161.33,3514.86 U1.133 ; v1(3191.2,1762.61) 4707.37,1762.61 JTAG1.13
  Bottom Layer w10: v1(3093.38,1762.61) v1(3191.2,1762.61)
JTMS: JTAG1.7 U1.105 | length 2380.8
  Top Layer w10: U1.105 4042.83,3563.64 4042.83,3601.39 4218.21,3776.77 4255.96,3776.77 4255.96,3912.28 4797.95,3912.28 v5(5282.72,3427.51) ; v1(5449.84,3427.51) JTAG1.7
  Bottom Layer w10: v5(5282.72,3427.51) v1(5449.84,3427.51)
LCD_CS: P3.1 U1.127 | length 1669.8
  Top Layer w10: P3.1 3051.53,3540.98 3051.24,3540.68 3175.42,3540.68 3402.08,3314.01 3473.04,3313.99 3494.18,3335.13 3508.1,3335.13 U1.127
MO: P3.32
MOSI: P3.30 U1.21 | length 8227
  Top Layer w10: v1(3027.76,1594.99) 5821.12,1594.99 6051.18,1825.05 6051.18,3527.76 6022.77,3556.16 5843.84,3556.16 4658.05,4741.95 4500.42,4741.95 4451.53,4693.07 P3.30 ; v1(3027.76,1807.3) 3027.76,2068.69 3295.91,2336.84 3302.42,2336.84 3329.92,2364.34 3329.92,2377.47 U1.21
  Bottom Layer w10: v1(3027.76,1594.99) v1(3027.76,1807.3)
NetBEEP1_2: BEEP1.2 Q1.3 | length 254.4
  Top Layer w10: BEEP1.2 4574.87,2089.71 Q1.3
NetC2_2: C2.2 C3.1 C4.2 U2.1 | length 803.6
  Top Layer w10: U2.1 2408.38,4368.84 2500.41,4276.81 C2.2 2874.41,4198.98 C3.1 2844.02,4168.6 C4.2
NetLED1_1: LED1.1 R5.1 | length 241.8
  Top Layer w10: LED1.1 2764.49,4469.08 R5.1
NetP1_3: P1.3 R1.1 | length 738.1
  Top Layer w10: R1.1 5232.21,2943.63 5483.87,2943.63 5503.24,2963 5503.24,3103.74 5483.87,3123.11 5318.52,3123.11 P1.3
NetP1_4: P1.4 R2.2 | length 665.9
  Top Layer w10: R2.2@5254.43,2895.85 5496.78,2895.85 5536.81,2935.88 5536.81,3119.24 5490.51,3165.54 P1.4
  Top Layer w15: R2.2 R2.2@5254.43,2895.85
NetQ1_2: Q1.2 R6.2 R7.2 | length 293.7
  Top Layer w10: R6.2 4652.71,2037.63 Q1.2 4833.78,2139.7 R7.2
NetR3_2: R3.2 U1.32 | length 281
  Top Layer w10: R3.2 3574.99,2316.31 U1.32
NRST: C1.2 JTAG1.15 P3.5 R4.1 RESET.1 U1.25 | length 9081.3
  Top Layer w10: R4.1 2552.87,3538.73 C1.2 2552.87,3729.98 2608.65,3785.77 RESET.1@2608.65,4041.67 ; P3.5 3207.44,4591.81 3167.91,4631.34 3017.87,4631.34 3012.01,4625.48 3012.01,4376.81 3014.5,4374.33 3014.5,3544.73 2661.82,3544.73 2375.87,3258.78 2375.87,1700.44 3140.18,1700.44 ; U1.25 3140.18,2076.37 3140.18,1700.44 ; JTAG1.15 4745.2,1700.44 3140.18,1700.44
PA0: U1.34
PA1: U1.35
PA2: U1.36
PA3: U1.37
PA4: U1.40
PA5: U1.41
PA6: U1.42
PA7: U1.43
PA8: U1.100
PA9: P2.2 U1.101 | length 1561.5
  Top Layer w10: U1.101 4090.76,3500.21 4090.76,3585.49 4222.41,3717.15 4236.97,3717.15 4237.94,3718.12 4343.69,3718.12 4368.95,3692.85 v1(4368.95,3466.17) ; v1(4855.37,3466.17) 4925.41,3466.17 P2.2
  Bottom Layer w10: v1(4368.95,3466.17) v1(4855.37,3466.17)
PA10: P2.1 U1.102 | length 1534.4
  Top Layer w10: U1.102 4075.76,3513.05 4075.76,3601.39 4076.58,3601.39 4225.32,3750.13 4359.21,3750.13 4403.14,3706.2 v1(4403.14,3517.32) ; v1(4893.83,3517.32) 4974.26,3517.32 P2.1
  Bottom Layer w10: v1(4403.14,3517.32) v1(4893.83,3517.32)
PA11: U1.103
PA12: U1.104
PB5: U1.135
PB6: U1.136
PB7: U1.137
PB9: U1.140
PB10: U1.69
PB11: U1.70
PB12: U1.73
PB13: U1.74
PB14: U1.75
PB15: U1.76
PC0: U1.26
PC1: U1.27
PC2: U1.28
PC3: U1.29
PC4: U1.44
PC5: U1.45
PC6: U1.96
PC7: U1.97
PC8: U1.98
PC9: U1.99
PC10: U1.111
PC11: U1.112
PC12: U1.113
PC13: U1.7
PC14: C8.2 U1.8 Y2.2 | length 498.5
  Top Layer w10: Y2.2 3153.89,2908.42 C8.2 3246.78,2815.54 3246.78,2784.6 v1(3285.2,2784.6) ; v1(3352.62,2784.6) 3375.15,2784.6 U1.8
  Bottom Layer w10: v1(3285.2,2784.6) v1(3352.62,2784.6)
PC15: C7.2 U1.9 Y2.1 | length 465.5
  Top Layer w10: Y2.1 3115.88,2716.3 C7.2 v1(3246.73,2756.59) ; v1(3327.32,2756.59) 3374.98,2756.59 U1.9
  Bottom Layer w10: v1(3246.73,2756.59) v1(3327.32,2756.59)
PD2: U1.116
PD3: U1.117
PD4: P3.4 U1.118 | length 1547.3
  Top Layer w10: P3.4 3160.6,4691.81 3214.85,4637.57 3303.53,4637.57 v1(3303.53,3940.11) ; v1(3370.99,3872.65) 3414.93,3828.71 3414.93,3678.85 U1.118
  Bottom Layer w10: v1(3303.53,3940.11) v1(3370.99,3872.65)
PD5: P3.3 U1.119 | length 1775.3
  Top Layer w10: P3.3 3151.53,3733.95 3085.09,3667.5 3085.09,3568.93 3095.34,3558.68 3194.39,3558.68 3404.05,3349.02 3480.22,3349.02 3577.69,3446.49 3619.45,3446.49 U1.119
PD6: U1.122
PD7: U1.123
PD11: U1.80
PD12: U1.81
PD13: U1.82
PE0: U1.141
PE1: U1.142
PE2: U1.1
PE3: U1.2
PE4: U1.3
PE5: U1.4
PE6: U1.5
PEN: P3.31 U1.22 | length 6390.9
  Top Layer w10: v1(3097.2,1807.3) 3097.2,2116.91 3152.05,2116.91 3357.22,2322.08 3357.22,2376.93 U1.22 ; v1(3193.18,1807.3) 4641.71,1807.3 5594.34,2759.92 v1(5594.34,3100.97) ; P3.31 4551.53,4416.12 4681.56,4286.1 4681.56,4257.28 4979.8,4257.28 5594.34,3642.75 v1(5594.34,3577.78)
  Bottom Layer w10: v1(3097.2,1807.3) v1(3193.18,1807.3) ; v1(5594.34,3100.97) v1(5594.34,3577.78)
PF0: U1.10
PF1: U1.11
PF2: U1.12
PF3: U1.13
PF4: U1.14
PF5: U1.15
PF6: U1.18
PF7: U1.19
PF8: U1.20
PF12: U1.50
PF13: U1.53
PF14: U1.54
PF15: U1.55
PG0: P3.2 U1.56 | length 6882.4
  Top Layer w10: P3.2 2927.96,4815.39 2395.74,4815.39 2293.34,4712.99 2293.34,1713.03 2359.63,1646.74 v1(4203.01,1646.74) ; U1.56 4241.67,2657.24 v1(4241.67,2631.79)
  Bottom Layer w10: v1(4203.01,1646.74) 4203.01,2616.79 4218.02,2631.79 v1(4241.67,2631.79)
PG1: U1.57
PG2: U1.87
PG3: U1.88
PG4: U1.89
PG5: U1.90
PG6: U1.91
PG7: U1.92
PG8: U1.93
PG9: U1.124
PG10: U1.125
PG11: U1.126
PG13: U1.128
PG14: U1.129
PG15: U1.132
VBAT: BAT1.1 U1.6 | length 1010.6
  Top Layer w10: BAT1.1 2996.32,2461.45 U1.6
VDDA: C12.2 L1.1 R3.1 U1.33 | length 668.4
  Top Layer w10: L1.1 3653.26,1995.69 C12.2 3723.45,2181.3 R3.1 3629.49,2342.97 U1.33
X1: C5.2 U1.23 Y1.1 | length 1365.5
  Top Layer w10: Y1.1 2661.2,2237.2 2778.33,2354.34 C5.2 2921.21,2354.34 2946.21,2379.34 v1(3312.42,2379.34) ; v1(3386.89,2379.34) 3618.88,2611.32 U1.23
  Bottom Layer w10: v1(3312.42,2379.34) v1(3386.89,2379.34)
X2: C6.2 U1.24 Y1.2 | length 1072
  Top Layer w10: Y1.2 2965.36,2289.03 C6.2 v1(3295.17,2354.34) ; v1(3390.12,2354.34) 3390.3,2354.34 U1.24
  Bottom Layer w10: v1(3295.17,2354.34) v1(3390.12,2354.34)
pads on no net: BAT1.0 JTAG1.11 JTAG1.17 U1.30 U1.31 U1.106

## Polygon pours and split planes (outlines as drawn)
GND on Top Layer "Top Layer-No Net" (hatched 90Degree grid 20 track 20, remove dead copper, pour order 14): 1906.64,4921.54 6345.58,4921.54 6357.17,4909.96 6360.93,4906.2 6360.93,1424.85 1911.91,1424.85 1896.58,1440.18 1896.58,4923.17
GND on Bottom Layer "Top Layer-No Net" (hatched 90Degree grid 20 track 20, remove dead copper, pour order 16): 1903.03,4933.5 6348.78,4933.5 6372.77,4909.51 6372.77,1415.28 1927.02,1415.28 1887.04,1455.26 1887.04,4933.5

## Keep-outs
Top Layer:
  lines w10: 1904.14,4917.21 1904.14,1432.62 1911.91,1424.85 6360.93,1424.85 6368.2,1432.12 6368.2,4917.21 6363.87,4921.54 1906.64,4921.54

## Text inside footprints (layer, text, board x,y; h text height)
P1: Top Overlay "1" at 5256.1,3345.54 h50 r270; Top Overlay "2" at 5356.1,3365.54 h50 r270; Top Overlay "5" at 5256.1,3005.54 h50 r270; Top Overlay "6" at 5356.1,3005.54 h50 r270
P3: Top Overlay "34" at 4711.53,4671.81 h50; Top Overlay "33" at 4711.53,4571.81 h50; Top Overlay "1" at 2931.53,4571.81 h50; Top Overlay "2" at 2931.53,4671.81 h50
U2: Top Overlay "1" at 2402.38,4544.44 h50